# Altium PCB PCB_1.PcbDoc
Units mm, origin at the board's own origin, x right, y up, seen from the top; angles counter-clockwise.
Board outline 60.96 x 53.34 mm, 2 copper layers (Top Layer, Bottom Layer), stack 0.47 mm thick; 47 components, 47 nets, 154 pads, 11 vias.
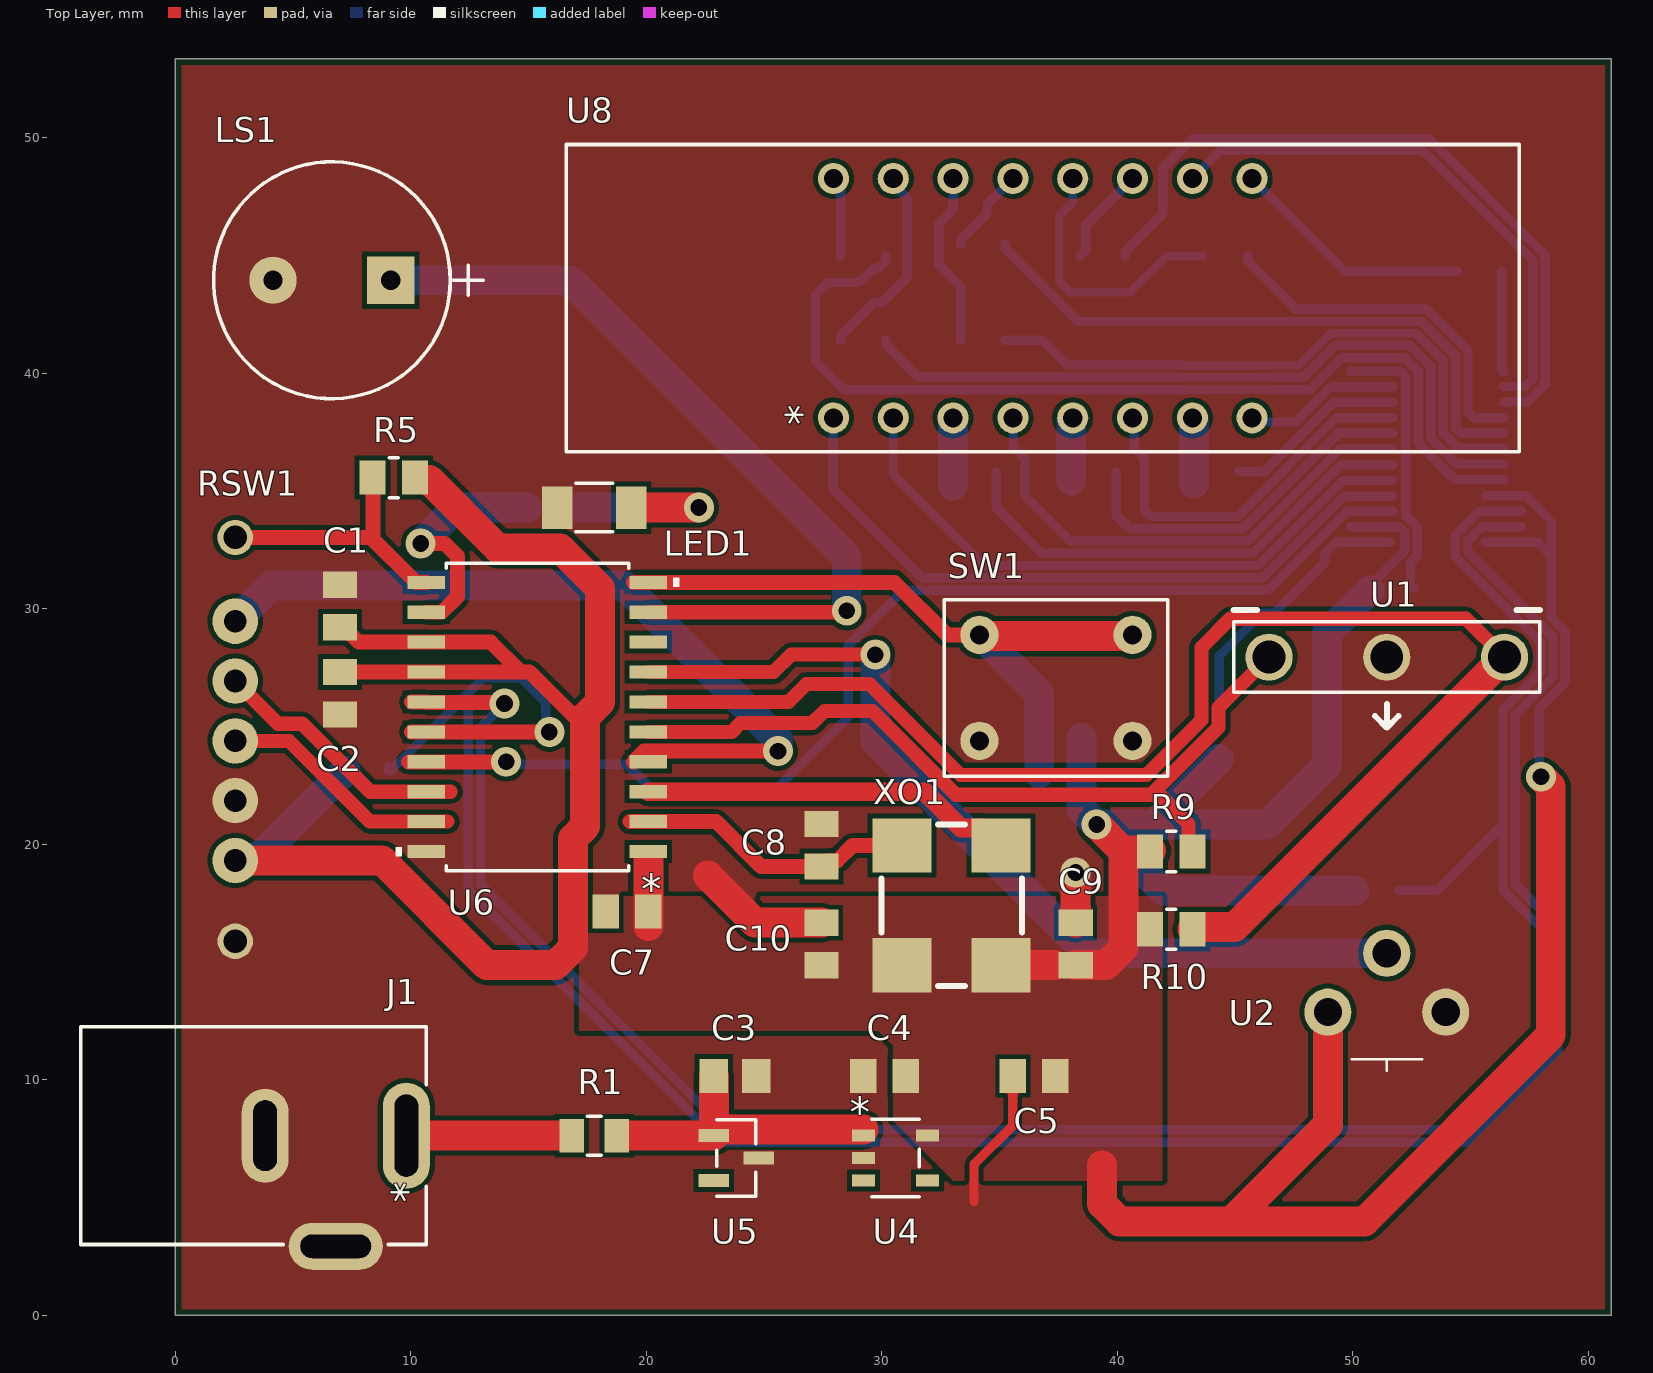
[diagram p0: Top Layer view]
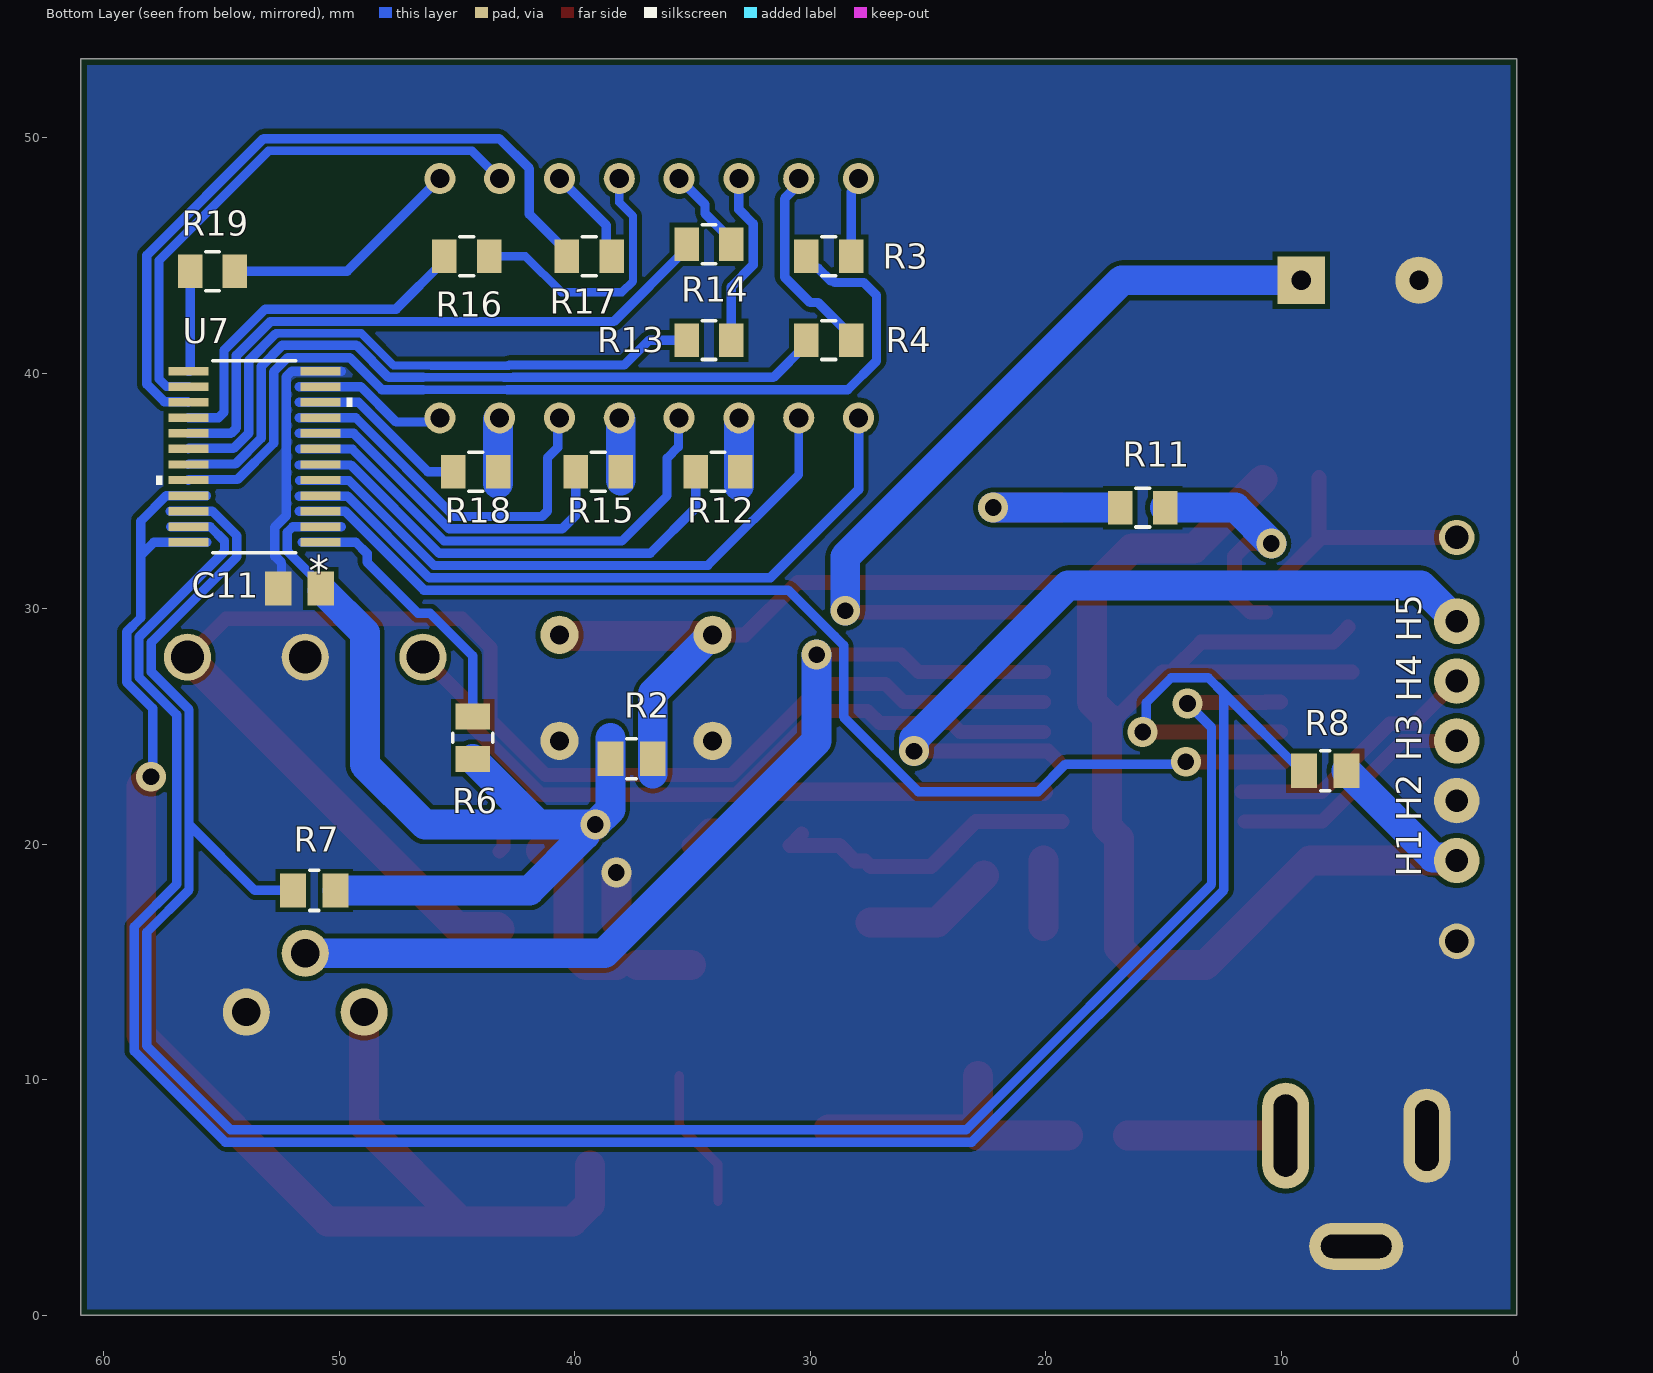
[diagram p1: Bottom Layer view, seen from below]
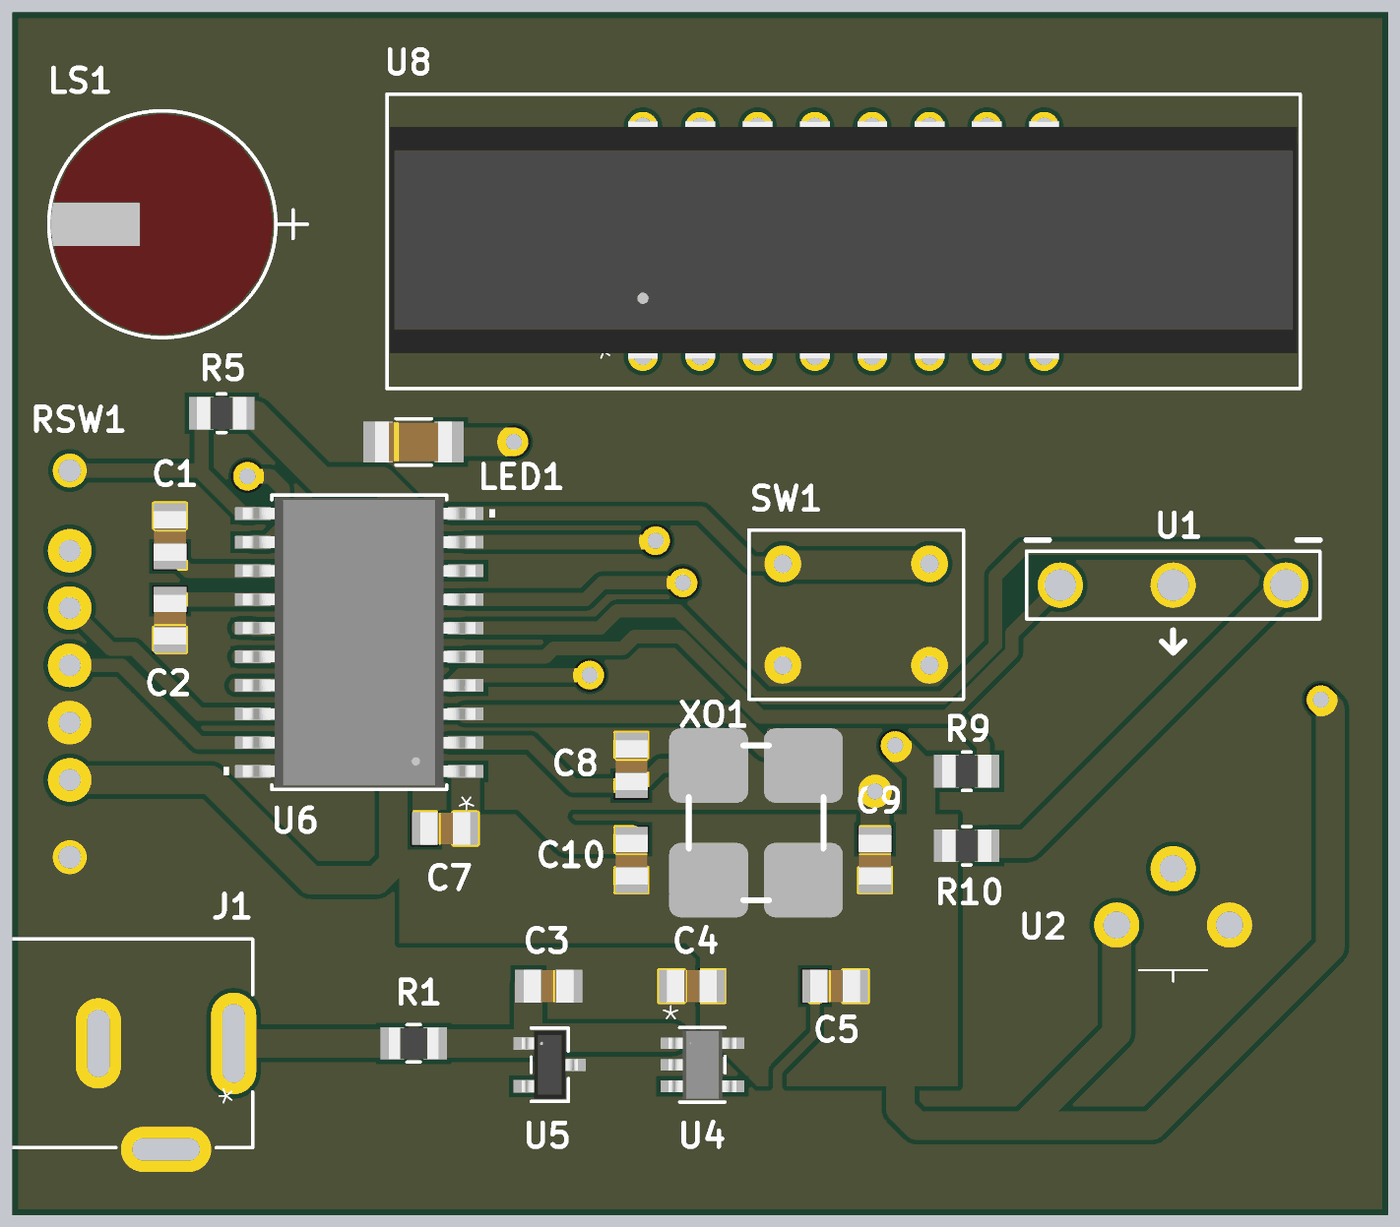
[diagram p2: 3D render of the assembled board from above, using the file's embedded part models]
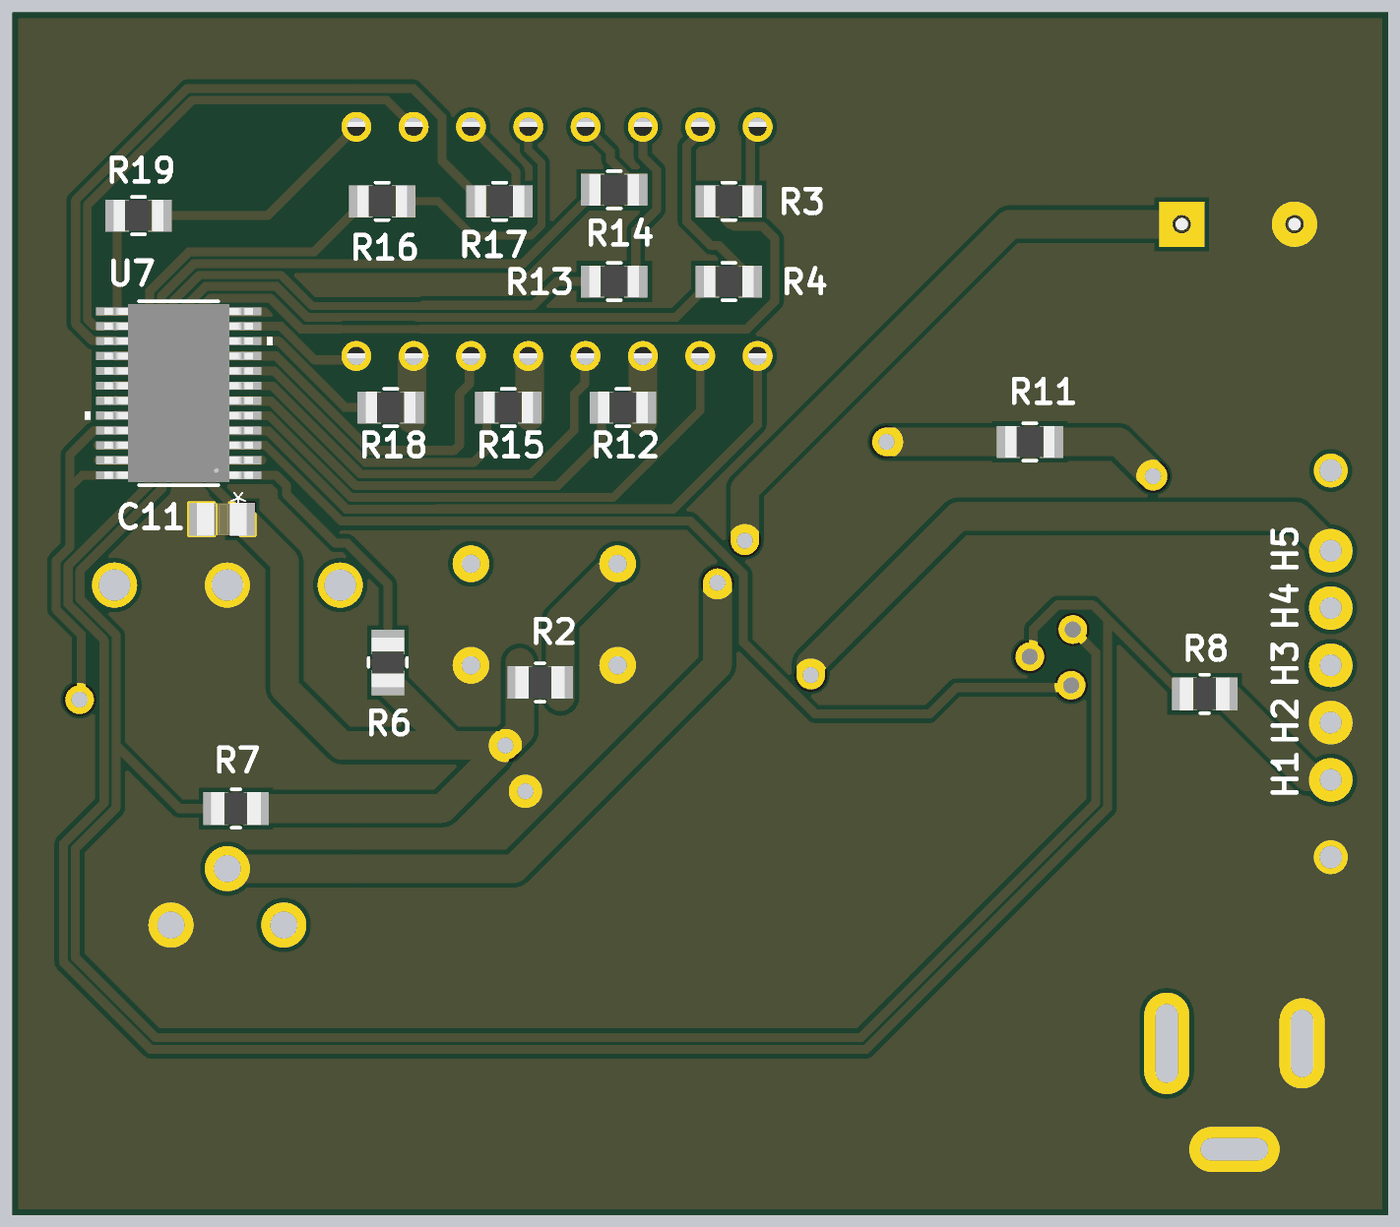
[diagram p3: 3D render of the assembled board from below, using the file's embedded part models]

## Layer stack, top to bottom
Top Solder: solder mask 0.0102, Solder Resist, Dk 3.5
Top Layer: signal copper 0.035
Dielectric 1: dielectric 0.4, FR-4, Dk 4.8
Bottom Layer: signal copper 0.035
Bottom Solder: solder mask 0.0102, Solder Resist, Dk 3.5

## Board outline
0,0 0,53.34 60.96,53.34 60.96,0

## Design rules (kind name [scope] priority, off if disabled: settings)
AssemblyTestpoint [All] p1: testpointundercomponent=TRUE minsize=1.016 maxsize=2.54 preferedsize=1.524 minholesize=0 maxholesize=1.016 preferedholesize=0.813 testpointgrid=0.025 usegrid=TRUE gridoriginx=25.4 gridoriginy=25.4 gridtolerance=0 allowsidetop=TRUE allowsidebottom=TRUE
BoardOutlineClearance [All] p1: gap=0.254 ignorepadtopadclearanceinfootprint=FALSE except(0: Arc-SplitContinuation Track-SplitContinuation SMDPad-SplitContinuation THPad-SplitContinuation Via-SplitContinuation Fill-SplitContinuation Poly-SplitContinuation Region-SplitContinuation Text-SplitContinuation; 0.3: Track-OutlineEdge)
Clearance [All] p1: gap=0.2 ignorepadtopadclearanceinfootprint=TRUE except(0: Text-Text; 0.05: Arc-Text Track-Text SMDPad-Text THPad-Text Via-Text Fill-Text Poly-Text Region-Text; 0.127: Arc-Arc Arc-Track Arc-Region Track-Track Track-Region SMDPad-SMDPad SMDPad-Region THPad-Region Via-Region Fill-Region Poly-Region Region-Region; 0.254: Arc-Via Arc-Hole Track-Via Track-Hole SMDPad-Via SMDPad-Hole THPad-Via THPad-Hole Via-Via Via-Hole Fill-Hole Poly-Hole Region-Hole Text-Hole Hole-Hole; 0.33: Arc-THPad Track-THPad SMDPad-THPad; 0.5: THPad-THPad)
DiffPairsRouting [All] p1: maxlimit=0.5 minlimit=0.127 mostfreqgap=0.254 toplayer_minwidth=0.381 toplayer_maxwidth=0.381 toplayer_prefwidth=0.381 bottomlayer_minwidth=0.381 bottomlayer_maxwidth=0.381 bottomlayer_prefwidth=0.381 maxuncoupledlength=12.7
FabricationTestpoint [All] p1: side=3 testpointundercomponent=TRUE minsize=1.016 maxsize=2.54 preferedsize=1.524 minholesize=0 maxholesize=1.016 preferedholesize=0.813 testpointgrid=0.025 allowsidetop=TRUE allowsidebottom=TRUE usegrid=TRUE gridoriginx=25.4 gridoriginy=25.4 gridtolerance=0
HoleSize "Via Hole Size" [IsVia] p1: absolutevalues=TRUE maxlimit=6.35 minlimit=0.3 maxpercent=80.000 minpercent=20.000
HoleSize [All] p2: absolutevalues=TRUE maxlimit=6.35 minlimit=0.2 maxpercent=80.000 minpercent=20.000
HoleToHoleClearance [All] p1: gap=0.5 allowstackedmicrovias=TRUE
MaximumViaCount [IsBlindVia] p1: limit=0
MinimumAnnularRing [All] p1: minimumring=0.25
PasteMaskExpansion [All] p1: expansion=0.5
PlaneClearance [All] p1: clearance=0.2
PolygonConnect [All] p1: connectstyle=Direct reliefconductorwidth=0.254 reliefentries=4 polygonreliefangle="90 Angle" airgapwidth=0.254
RoutingCorners [All] p1: cornerstyle=45-Degree minsetback=4.08 maxsetback=10
RoutingVias RoutingVias_1 [All] p1: holewidth=0.711 width=1.27 viastyle="Through Hole" minholewidth=0.3 minwidth=0.5 maxholewidth=5 maxwidth=20
RoutingVias [All] p2: holewidth=0.711 width=1.27 viastyle="Through Hole" minholewidth=0.711 minwidth=1.27 maxholewidth=0.711 maxwidth=1.27
SilkToSilkClearance [All] p1: silktosilkclearance=0
SilkToSolderMaskClearance [IsPad] p1: minsilkscreentomaskgap=0.15 clearancetoexposedcopper=TRUE
SolderMaskExpansion [All] p1: expansion=0.102 istentingtop=FALSE
SupplyNets "Schematic Supply Nets_2" [InNet('VDDIO2')] p1: voltage=0.000
SupplyNets "Schematic Supply Nets_1" [InNet('GND')] p2: voltage=0.000
ViasUnderSMD [All] p1: allowed=FALSE
Width [All] p1: maxlimit=20 minlimit=0.127 preferedwidth=1.27 minimp=50.000000 maximp=50.000000 favimp=50.000000
20 further rules are at their usual default settings.

## Components (designator, comment, footprint, x,y, rotation, side; value= is the part's Value field where it differs from the comment)
C1 "100nF" 0805_AVX 6.985,30.112 r270 top
C2 "100nF" 0805_AVX 6.985,26.403 r90 top
C3 "4.7uF" CAP_08051A0R8CAT2A_AVX 23.762,10.16 r180 top
C4 "100nF" 0805_AVX 30.112,10.16 r0 top
C5 "100nF" 0805_AVX 36.462,10.16 r0 top
C7 "100nF" 0805_AVX 19.177,17.145 r0 top
C8 "100nF" 0805_AVX 27.432,19.952 r270 top
C9 "100nF" 0805_AVX 38.227,15.761 r270 top
C10 "100nF" 0805_AVX 27.432,15.761 r270 top
C11 "100nF" 0805_AVX 51.676,30.861 r180 bottom
H1 "Output" "1 pin header" 2.54,19.304 r90 bottom
H2 "Output" "1 pin header" 2.54,21.844 r90 bottom
H3 "Output" "1 pin header" 2.54,24.384 r90 bottom
H4 "Output" "1 pin header" 2.54,26.924 r90 bottom
H5 "Output" "1 pin header" 2.54,29.464 r90 bottom
J1 "PJ-002A" PJ-002A_CUD 3.315,7.62 r90 top
LED1 "156120VS75300" LED_VS75300_WRE 17.78,34.29 r0 top
LS1 "2.7kHz" CMI-9605IC_CUD 9.144,43.942 r180 top
R1 "100R" 0805_VIS 17.78,7.62 r0 top
R2 "4.7K" RES_1220_SUS 37.579,23.622 r0 bottom
R3 "250R" 0805_VIS 29.21,44.958 r0 bottom
R4 "250R" 0805_VIS 29.21,41.402 r0 bottom
R5 "4.7K" RES_1220_SUS 9.271,35.56 r0 top
R6 "4.7K" RES_1220_SUS 44.323,24.511 r270 bottom
R7 "4.7K" RES_1220_SUS 51.054,18.034 r180 bottom
R8 "4.7K" RES_1220_SUS 8.128,23.114 r180 bottom
R9 "4.7K" RES_1220_SUS 42.291,19.685 r180 top
R10 "4.7K" RES_1220_SUS 42.291,16.383 r180 top
R11 "250R" 0805_VIS 15.875,34.29 r0 bottom
R12 "250R" 0805_VIS 33.909,35.814 r180 bottom
R13 "250R" 0805_VIS 34.29,41.402 r0 bottom
R14 "250R" 0805_VIS 34.29,45.466 r0 bottom
R15 "250R" 0805_VIS 38.989,35.814 r180 bottom
R16 "250R" 0805_VIS 44.577,44.958 r0 bottom
R17 "250R" 0805_VIS 39.37,44.958 r0 bottom
R18 "250R" 0805_VIS 44.196,35.814 r180 bottom
R19 "250R" 0805_VIS 55.372,44.323 r0 bottom
RSW1 "10-15AT" GP56010-15 2.54,15.875 r90 top
SW1 "TS02-66-160-BK-100-LCR-D" TS02-66-160-BK-100-LCR-D 40.64,28.884 r180 top
U1 "Encoder" 288T232R161A1 46.435,27.94 r0 top
U2 "Potentiometer" 2002111655 48.935,12.867 r0 top
U4 "5V LDO" SOT-23-5-DBV_TEX 30.575,6.67 r0 top
U5 "MMBZ16VAT-QR" SOT_SM712 23.812,6.67 r270 top
U6 "MCU" SOIC20_SO_MCH 15.367,25.4 r180 top
U7 "IO Expander" TSSOP24_4P5X7P9_NXP 53.594,36.449 r0 bottom
U8 "LED Display" TDCG1060M_VIS 36.83,43.18 r90 top
XO1 "32MHz" CB3-3C-64M0000 35.052,14.859 r90 top

## Footprints (in the part's own frame and the unit in brackets; to place one, negate y for a bottom-side part, rotate by r counter-clockwise, add the part's x,y. Pads: shape width x height; smd on the part's side, far side on the other; paste and mask are expansions set on the pad)
"1 pin header" [mil]
  round 76 / inner rect 70.87x78.74 / far side round 76 hole 38 mask+0: 1(0,0)
288T232R161A1 [mm]
  round 2 hole 1.4 mask+0: A(0,0) B(10,0) C(5,0)
  silkscreen extent -1.5,-3 11.5,2
0805_AVX [mil]
  rect 44x57 smd paste+0 mask+3: 1(-35.5,0) 2(35.5,0)
  body extent -44,-29 44,29, height 37
0805_VIS [mil]
  rect 41x56 smd paste+0 mask+0: 1(-37.46,0) 2(37.46,0)
  silkscreen extent -12,-33 12,33, body extent -43,-28 43,28, height 33
2002111655 [mm] "Potentiometer"
  round 2 hole 1.2 mask+0: 1(0,0) 2(5,0) 3(2.5,2.5)
  silkscreen extent 1,-2.5 4,-2
CAP_08051A0R8CAT2A_AVX [mil]
  rect 47.24x57 smd paste+0 mask+0: 1(-35.5,0) 2(35.5,0)
  body extent -44,-29 44,29, height 37
CB3-3C-64M0000 [mm]
  rect 2.3x2.5 smd mask+0: 1(0,0) 2(5.08,0) 3(5.08,4.2) 4(0,4.2)
  silkscreen extent -0.89,-0.89 5.97,5.08
CMI-9605IC_CUD [mil]
  rect 79x79 / inner round 60 / far side rect 79x79 hole 32 paste-99999 mask+0: 1(0,0)
  round 79 / inner round 60 / far side round 79 hole 32 paste-99999 mask+0: 2(196.85,0)
  silkscreen extent -155,-198 296,198, body extent -95,-193 292,193, height 188
GP56010-15 [mm]
  round 1.5 hole 1 mask+0: 1(0,0) 2(17.145,0)
LED_VS75300_WRE [mil]
  rect 51.18x71 smd paste+0 mask+0: 1(-62,0) 2(62,0)
  silkscreen extent -31,-40 31,40, body extent -67,-36 67,36, height 55
PJ-002A_CUD [mm]
  oval 4.5x2 hole 1 slot 3.5 at 0 deg paste-2539.97 mask+0: 1(0,-6.49)
  oval 4x2 hole 1 slot 3 at 0 deg paste-2539.97 mask+0: 2(0,-0.495)
  oval 2x4 hole 1 slot 3 at 90 deg paste-2539.97 mask+0: 3(-4.699,-3.492)
  silkscreen extent -4.62,-7.33 4.62,7.33
RES_1220_SUS [mm]
  rect 1.1x1.45 smd paste+0 mask+0: 1(-0.902,0) 2(0.902,0)
  silkscreen extent -0.19,-0.85 0.19,0.85, body extent -1.1,-0.72 1.1,0.72, height 0.7
SOIC20_SO_MCH [mil]
  rect 63x22 smd paste+0 mask+0: 1(-185.5,225) 2(-185.5,175) 3(-185.5,125) 4(-185.5,75) 5(-185.5,25) 6(-185.5,-25) 7(-185.5,-75) 8(-185.5,-125) 9(-185.5,-175) 10(-185.5,-225) 11(185.5,-225) 12(185.5,-175) 13(185.5,-125) 14(185.5,-75) 15(185.5,-25) 16(185.5,25) 17(185.5,75) 18(185.5,125) 19(185.5,175) 20(185.5,225)
  silkscreen extent -237,-257 237,257, body extent -203,-252 203,252, height 104
SOT-23-5-DBV_TEX [mil]
  rect 38.5x20 smd paste+0 mask+0: 1(-53.75,37.4) 2(-53.75,0) 3(-53.75,-37.4) 4(53.75,-37.4) 5(53.75,37.4)
  silkscreen extent -40,-65 40,65, body extent -59,-60 59,60, height 43
SOT_SM712 [mil]
  rect 22x51 smd paste+0 mask+0: 1(-37.4,-37.5) 2(37.4,-37.5) 3(0,37.5)
  silkscreen extent -64,-33 64,33, body extent -59,-49 59,49, height 46
TDCG1060M_VIS [mil]
  round 52 hole 32 paste-99999 mask+0: 1(-200,350) 2(-200,250) 3(-200,150) 4(-200,50) 5(-200,-50) 6(-200,-150) 7(-200,-250) 8(-200,-350) 9(200,-350) 10(200,-250) 11(200,-150) 12(200,-50) 13(200,50) 14(200,150) 15(200,250) 16(200,350)
  silkscreen extent -257,-796 257,796, body extent -205,-791 210,791, height 281
TS02-66-160-BK-100-LCR-D [mil] "Push button"
  round 64 hole 32 mask+0: 1(0,0) 1(255.91,0) 2(0,177.17) 2(255.91,177.17)
  silkscreen extent -59,-59 315,236
TSSOP24_4P5X7P9_NXP [mil]
  rect 67x14 smd paste+0 mask+0: 1(-110.5,143) 2(-110.5,117) 3(-110.5,91) 4(-110.5,65) 5(-110.5,39) 6(-110.5,13) 7(-110.5,-13) 8(-110.5,-39) 9(-110.5,-65) 10(-110.5,-91) 11(-110.5,-117) 12(-110.5,-143) 13(110.5,-143) 14(110.5,-117) 15(110.5,-91) 16(110.5,-65) 17(110.5,-39) 18(110.5,-13) 19(110.5,13) 20(110.5,39) 21(110.5,65) 22(110.5,91) 23(110.5,117) 24(110.5,143)
  silkscreen extent -164,-160 164,160, body extent -130,-156 130,156, height 43

## Part data
C1 C2 C4 C5 C7 C8 C9 C10 C11: library part 08051C103JAT2A, Mfr_Name="KYOCERA AVX"
C3: library part 08053C472K4Z2A, Mfr_Name="KYOCERA AVX"
H1 H2 H3 H4 H5: library part "1 pin header"
J1: "DC power plug", Mfr_Name="CUI Devices", RefDes=RefDes, Type=Type
LED1: "LED", Mfr_Name="Wurth Electronics"
LS1: library part CMI-9605IC-0380T, "Buzzer", Mfr_Name="CUI Devices", RefDes=RefDes, Type=Type
R1: library part RCG080510R0FKEA, Mfr_Name=Vishay
R2 R5 R6 R7 R8 R9 R10: library part RG2012P-472-B-T5, Mfr_Name=Susumu
R3 R4 R11 R12 R13 R14 R15 R16 R17 R18 R19: library part RNCF0805TKY250R, Mfr_Name=Vishay
RSW1: library part GP56010-15, "Reed switch"
SW1: "Push button"
U1: library part 288T232R161A1, "2b Encoder"
U2: library part 2002111655
U4: library part TPS7B92050DBVR, Mfr_Name="Texas Instruments", RefDes=RefDes, Type=Type
U5: "13V TVS", Mfr_Name="Bourns Electronics", RefDes=RefDes, Type=Type
U6: library part PIC18F15Q20T-ISO, "PIC MCU", Mfr_Name=Microchip, RefDes=RefDes, Type=Type
U7: library part PCAL6416APW, "16 I/O expander", Mfr_Name=NXP, RefDes=RefDes, Type=Type
U8: library part TDCR1060M, "4 digit LED display", Mfr_Name=Vishay, RefDes=RefDes, Type=Type
XO1: library part FO7HHADM320-T1, "32MHz Clock"

## Via types
v1: diameter 1.27, hole 0.711, Top Layer to Bottom Layer, 11 vias

## Nets (pads, with @x,y where several pads share a name; then routed paths per layer and width w, separated by ;. In a path a pad name is that pad's centre, name@x,y a point inside that pad or via, vN(x,y) a via of type N, cw(c..) or ccw(c..) an arc to the next point about the centre after c; other vN are vias at no path point)
BUZ: LS1.1 U6.9 | length 35
  Top Layer w0.635: U6.9 28.44,29.845 v1(28.503,29.909)
  Bottom Layer w1.27: LS1.1 16.764,43.942 28.503,32.203 v1(28.503,29.909)
CLOUT: U6.3 XO1.2 | length 15.9
  Top Layer w0.8: U6.3 31.815,22.225 33.351,20.689 34.302,20.689 XO1.2
ENA1: R9.1 U1.A U6.5 | length 34.4
  Top Layer w0.6: U6.5 23.624,24.765 23.996,25.137 27.042,25.137 27.559,25.654 29.591,25.654 33.147,22.098 41.423,22.098 41.603,22.278 ; R9.1 43.02,19.857 43.02,20.861 41.603,22.278 ; U1.A 44.288,25.793 44.288,24.963 41.603,22.278
ENB1: R10.1 U1.B U6.6 | length 61.5
  Top Layer w0.6: U6.6 26.035,26.035 26.797,26.797 29.476,26.797 33.332,22.941 41.238,22.941 43.561,25.265 43.561,28.351 44.78,29.57 54.805,29.57 U1.B
  Top Layer w1.27: R10.1 43.193,16.388 43.278,16.473 44.968,16.473 U1.B
GND: C1.1 C2.1 C3.1 C4.1 C5.1 C7.1 C8.1 C9.1 C10.1 C11.1 H2.1 J1.2 J1.3 LED1.1 LS1.2 RSW1.1 SW1.2 U1.C U2.2 U4.2 U5.3 U6.20 U7.12 | length 25.6
  Top Layer w0.4: 33.909,4.826 33.909,6.406 35.56,8.057 C5.1
  Top Layer w1.27: 22.606,18.669 24.613,16.662 C10.1 ; C9.1 v1(38.227,18.796)
  Bottom Layer w0.4: 49.911,40.081 52.014,40.081 52.248,39.847 52.248,33.937 52.724,33.461 52.724,32.23 52.444,31.951 52.444,30.995 C11.1
LED1: R11.1 U6.12 | length 10.2
  Top Layer w0.635: v1(10.414,32.766) 11.43,32.766 11.973,32.223 11.973,30.515 11.303,29.845 U6.12
  Bottom Layer w1.27: v1(10.414,32.766) 11.938,34.29 R11.1
NetC3_2: C3.2 R1.2 U4.1 U5.1 | length 12.7
  Top Layer w1.27: R1.2@19.05,7.62 U5.1 U5.1@22.86,7.861 ; C3.2 U5.1@22.86,7.861 ; 29.21,7.874 22.873,7.874 U5.1@22.86,7.861
NetH3_1: H3.1 U6.19 | length 10.4
  Top Layer w0.6: H3.1 4.823,24.384 8.252,20.955 U6.19 11.557,20.955
NetH4_1: H4.1 U6.18 | length 11.1
  Top Layer w0.6: H4.1 4.353,25.111 5.386,25.111 8.272,22.225 U6.18 11.684,22.225
NetH5_1: H5.1 U6.4 | length 33.2
  Top Layer w0.635: U6.4@19.444,23.495 19.896,23.948 v1(25.582,23.948)
  Bottom Layer w1.27: H5.1 4.064,30.988 19.05,30.988 25.582,24.456 v1(25.582,23.948)
NetJ1_1: J1.1 R1.1 | length 6.7
  Top Layer w1.27: J1.1 R1.1@16.51,7.62
NetLED1_2: LED1.2 R11.2 | length 7.9
  Top Layer w1.27: LED1.2 v1(22.225,34.29)
  Bottom Layer w1.27: R11.2@17.196,34.29 v1(22.225,34.29)
NetR3_1: R3.1 U8.16 | length 3.4
  Bottom Layer w0.4: U8.16 27.94,48.011 28.258,47.692 R3.1
NetR4_1: R4.1 U8.15 | length 8.5
  Bottom Layer w0.4: R4.1 28.258,41.593 29.663,42.997 29.998,42.997 31.082,44.081 31.082,47.409 30.48,48.011 U8.15
NetR6_1: R6.1 U7.1 | length 12
  Bottom Layer w0.4: R6.1 44.323,27.992 46.136,29.805 46.648,29.805 48.808,31.965 48.808,32.338 49.287,32.817 U7.1 U7.1@51.562,32.817
NetR12_2: R12.2 U8.3 | length 2.9
  Bottom Layer w1.27: R12.2@33.02,35.225 U8.3
NetR13_1: R13.1 U8.14 | length 7.5
  Bottom Layer w0.4: U8.14 33.02,46.945 32.418,46.343 32.418,44.588 33.338,43.668 R13.1
NetR14_1: R14.1 U8.13 | length 3.7
  Bottom Layer w0.4: R14.1 33.338,45.657 34.459,46.777 34.459,47.159 U8.13
NetR15_2: R15.2 U8.5 | length 2.7
  Bottom Layer w1.27: R15.2@38.037,35.433 R15.2 38.037,38.024 38.1,38.086 U8.5
NetR16_1: R16.1 U8.12 | length 11.5
  Bottom Layer w0.35: U8.12 38.1,47.244 37.523,46.667 37.523,43.895 37.984,43.434 40.56,43.434 42.084,44.958 R16.1
NetR17_1: R17.1 U8.11 | length 4.2
  Bottom Layer w0.4: R17.1 38.649,45.189 38.649,46.269 U8.11
NetR18_2: R18.2 U8.7 | length 2.8
  Bottom Layer w1.27: U8.7 43.18,38.086 43.244,38.022 R18.2 R18.2@43.244,35.306
NetR19_1: R19.1 U8.9 | length 10.3
  Bottom Layer w0.4: U8.9 49.657,44.323 R19.1
PIN1: U7.4 U8.1 | length 29.8
  Bottom Layer w0.4: U8.1 27.94,35.052 31.678,31.314 42.229,31.314 42.231,31.312 46.177,31.312 49.641,34.776 51.689,34.776
PIN2: U7.5 U8.2 | length 26.7
  Bottom Layer w0.381: U8.2 30.48,35.687 34.335,31.832 42.444,31.832 42.446,31.83 45.963,31.83 49.579,35.446 51.689,35.446
PIN3: R12.1 U7.6 | length 20.7
  Bottom Layer w0.4: R12.1 34.861,34.27 36.782,32.349 42.658,32.349 42.66,32.347 45.749,32.347 49.498,36.097 51.689,36.097
PIN4: U7.7 U8.4 | length 21.6
  Bottom Layer w0.381: U8.4 35.591,38.069 35.591,36.868 36.068,36.391 36.068,34.798 37.999,32.867 42.872,32.867 42.874,32.865 45.534,32.865 49.436,36.767 51.689,36.767
PIN5: R15.1 U7.8 | length 15.5
  Bottom Layer w0.4: R15.1 39.941,33.973 40.53,33.384 43.087,33.384 43.089,33.382 45.32,33.382 46.521,34.583 49.378,37.44 U7.8 51.689,37.44
PIN6: U7.9 U8.6 | length 16.5
  Bottom Layer w0.4: U8.6 40.713,38.027 40.713,36.84 41.148,36.404 41.148,34.145 41.382,33.911 45.104,33.911 49.293,38.1 U7.9 51.689,38.1
PIN7: R18.1 U7.10 | length 7.8
  Bottom Layer w0.4: R18.1 46.228,35.814 49.174,38.76 U7.10 51.689,38.76
PIN8: U7.11 U8.8 | length 6.7
  Bottom Layer w0.4: U8.8 45.896,37.924 47.576,37.924 49.073,39.421 U7.11 51.689,39.421
PIN9: R19.2 U7.13 | length 4.3
  Bottom Layer w0.4: R19.2 56.324,40.103 56.346,40.081 U7.13
PIN10: U7.14 U8.10 | length 23.3
  Bottom Layer w0.381: U8.10 44.361,49.441 52.99,49.441 57.642,44.789 57.642,39.742 57.334,39.433 56.413,39.433 U7.14
PIN11: R17.2 U7.15 | length 30.8
  Bottom Layer w0.4: R17.2 40.322,45.148 41.919,46.746 41.919,48.682 43.195,49.958 53.204,49.958 58.16,45.003 58.16,39.527 57.415,38.783 56.423,38.783 U7.15
PIN12: R16.2 U7.16 | length 15.4
  Bottom Layer w0.4: R16.2 45.529,44.767 47.579,42.717 53.135,42.717 54.883,40.969 54.883,38.334 55.117,38.1 U7.16
PIN13: R14.2 U7.17 | length 26.4
  Bottom Layer w0.4: R14.2 35.242,45.276 38.327,42.19 52.916,42.19 54.356,40.75 54.356,37.674 54.59,37.44 U7.17
PIN14: R13.2 U7.18 | length 26
  Bottom Layer w0.35: 42.778,40.344 42.806,40.316 46.078,40.316 46.081,40.319 47.685,40.319 49.054,41.688 52.673,41.688 52.705,41.656
  Bottom Layer w0.4: R13.2 36.83,41.402 37.888,40.344 42.778,40.344 ; 52.705,41.656 53.829,40.532 53.829,37.456 54.483,36.801 56.379,36.801 U7.18
PIN15: R4.2 U7.19 | length 31.5
  Bottom Layer w0.35: 39.738,39.817 39.741,39.817 ; 43.011,39.814 43.022,39.825 46.428,39.825
  Bottom Layer w0.4: R4.2 30.162,41.212 31.556,39.817 39.738,39.817 42.611,39.817 42.614,39.814 43.011,39.814 ; 46.435,39.817 47.893,39.817 49.262,41.186 52.399,41.186 53.302,40.283 53.302,37.237 54.398,36.141 56.379,36.141 U7.19
PIN16: R3.2 U7.20 | length 40.8
  Bottom Layer w0.35: 42.846,39.287 42.85,39.29 46.435,39.29
  Bottom Layer w0.4: R3.2 30.162,44.767 29.841,44.447 29.65,44.447 29.114,43.91 29.008,43.91 28.945,43.847 27.718,43.847 27.178,43.307 27.178,40.513 28.401,39.29 42.393,39.29 42.396,39.287 42.846,39.287 ; 46.435,39.29 48.18,39.29 49.549,40.659 52.181,40.659 52.775,40.065 52.775,37.019 54.313,35.481 56.379,35.481 U7.20
POT1: U2.3 U6.7 | length 39.1
  Top Layer w0.6: U6.7 25.4,27.305 26.138,28.043 v1(29.718,28.043)
  Bottom Layer w1.27: v1(29.718,28.043) 29.718,24.384 38.735,15.367 U2.3
RST: U6.17 U7.3 | length 49
  Top Layer w0.635: U6.17@9.906,23.495 v1(14.043,23.495)
  Bottom Layer w0.4: v1(14.043,23.495) 14.142,23.396 19.149,23.396 20.32,22.225 25.4,22.225 28.575,25.4 28.575,28.44 28.954,28.82 30.922,30.787 42.011,30.787 42.013,30.785 46.396,30.785 49.748,34.138 U7.3 51.689,34.138
RSW: R5.1 RSW1.2 U6.11 | length 11.5
  Top Layer w0.635: RSW1.2 8.306,33.02 10.211,31.115 U6.11 ; 8.382,32.944 R5.1@8.382,35.56
SCL: R7.1 U6.15 U7.22 | length 96.5
  Top Layer w0.635: U6.15@10.033,26.035 U6.15 10.687,26.003 13.938,26.003 v1(13.97,25.971)
  Bottom Layer w0.4: v1(13.97,25.971) 12.954,24.956 12.954,18.288 23.368,7.874 54.61,7.874 58.166,11.43 58.166,16.256 56.369,18.053 56.369,20.828 ; R7.1 53.575,18.034 56.369,20.828 ; U7.22@57.167,34.138 U7.22 55.382,34.138 54.337,33.093 54.337,32.202 57.965,28.574 57.965,27.306 56.369,25.71 56.369,20.828
SDA: R8.1 U6.16 U7.23 | length 103.7
  Top Layer w0.635: U6.16@10.033,24.765 U6.16 v1(15.875,24.765)
  Bottom Layer w0.4: R8.1 R8.1@9.03,23.289 ; R8.1@9.144,23.114 12.427,26.397 ; v1(15.875,24.765) 15.726,24.914 15.726,26 14.666,27.06 13.09,27.06 12.427,26.397 ; U7.23@57.15,33.477 U7.23 55.467,33.477 54.864,32.874 54.864,32.42 58.492,28.792 58.492,27.088 56.896,25.492 56.896,18.288 58.693,16.491 58.693,11.212 54.828,7.347 23.133,7.347 12.427,18.053 12.427,26.397
SW1: R2.1 SW1.1 U6.10 | length 29.1
  Top Layer w0.635: U6.10@19.444,31.115 U6.10 30.527,31.115 32.758,28.884 SW1.1@34.14,28.884
  Top Layer w1.27: SW1.1@34.195,28.829 SW1.1@40.767,28.829
  Bottom Layer w1.27: SW1.1@34.208,28.862 36.678,26.392 R2.1 R2.1@36.678,22.987
VDDIO2: C1.2 C2.2 C4.2 C5.2 C7.2 C9.2 C10.2 C11.2 H1.1 R2.2 R5.2 R6.2 R7.2 R8.2 R9.2 R10.2 U2.1 U4.5 U6.1 U6.13 U6.14 U7.2 U7.21 U7.24 XO1.1 XO1.4 | length 189
  Top Layer w0.635: C2.2 U6.14 14.66,27.305 ; C1.2@7.15,29.21 7.785,28.575 U6.13 13.39,28.575 14.66,27.305 ; 17.081,24.884 17.081,25.265 15.041,27.305 14.66,27.305
  Top Layer w1.27: H1.1 8.776,19.304 13.221,14.859 16.138,14.859 16.882,15.603 16.882,20.241 17.399,20.758 17.399,25.396 18.034,26.031 18.034,30.857 16.338,32.553 13.695,32.553 10.778,35.47 ; C7.2@20.079,16.51 C7.2 20.079,19.304 ; XO1.1 37.338,14.859 ; C9.2 39.515,14.859 40.259,15.603 40.259,19.685 ; v1(39.116,20.828) 40.259,19.685 ; 39.351,6.365 39.351,4.719 40.095,3.975 44.831,3.975 ; R9.2@41.431,19.722 40.296,19.722 40.259,19.685 ; U2.1 48.935,8.079 44.831,3.975 ; v1(57.985,22.86) 58.4,22.445 58.4,11.886 50.489,3.975 44.831,3.975
  Bottom Layer w0.4: 49.911,33.477 U7.2 51.963,33.477 52.197,33.243 52.197,32.448 C11.2@50.775,31.026 ; U7.24@55.612,32.817 U7.24 57.861,32.817 58.42,32.258 ; U7.21@55.626,34.798 U7.21 57.335,34.798 58.42,33.713 58.42,32.258 ; v1(57.985,22.86) 57.912,22.933 57.912,25.763 59.019,26.87 59.019,29.01 58.42,29.609 58.42,32.258
  Bottom Layer w1.27: H1.1 2.666,19.43 3.543,19.43 7.136,23.024 7.141,23.024 7.226,23.109 R8.2 ; 38.481,24.511 R2.2 38.481,21.463 v1(39.116,20.828) 41.537,20.828 ; v1@39.56,20.383 41.91,18.034 R7.2@50.067,18.034 ; R6.2 44.266,23.552 44.261,23.552 41.537,20.828 ; C11.2@50.698,30.772 48.902,28.976 48.902,23.375 46.355,20.828 41.537,20.828
XTAL: C8.2 U6.2 XO1.3 | length 13.4
  Top Layer w0.6: XO1.3@30.353,20.438 XO1.3
  Top Layer w0.635: U6.2@19.304,20.955 U6.2 22.962,20.955 24.867,19.05 C8.2 27.673,19.291 28.102,19.291 28.75,19.939 XO1.3
pads on no net: U4.3 U4.4 U5.2 U6.8

## Polygon pours and split planes (outlines as drawn)
VDDIO2 on Top Layer "VDDIO2_L01_P000" (solid, pour order 0): 17.145,12.065 29.845,12.065 30.48,11.43 30.48,8.255 33.02,5.715 41.91,5.715 41.91,17.78 17.145,17.78
GND on Top Layer "GND_L01_P001" (solid, remove dead copper, pour order 1): 0,53.34 0,0 60.96,0 60.96,53.34
GND on Bottom Layer "GND_L02_P002" (solid, remove dead copper, pour order 2): 0,53.34 60.96,53.34 60.96,0 0,0

## Text inside footprints (layer, text, board x,y; h text height)
J1: Top Overlay "*" at 10.439,4.763 h1.27 r90; Mechanical 13 "*" at 10.439,4.763 h1.27 r90
U4: Top Overlay "*" at 28.639,8.001 h1.27; Mechanical 13 "*" at 29.635,6.909 h1.27
U6: Top Overlay "*" at 20.65,19.253 h1.27 r180; Mechanical 13 "*" at 19.05,20.345 h1.27 r180
U7: Mechanical 13 "*" at 51.41,33.846 h1.27 r180; Bottom Overlay "*" at 50.419,32.766 h1.27 r180
U8: Top Overlay "*" at 27.178,37.782 h1.27 r90; Mechanical 13 "*" at 28.575,36.716 h1.27 r90